# Altium PCB AVR精简学习板.PcbDoc (part 4 of 10)
Units mm, origin at the board's own origin, x right, y up, seen from the top; angles counter-clockwise.
Board outline 152.4 x 101.6 mm, 2 copper layers (Top Layer, Bottom Layer); 44 components, 51 nets, 211 pads, 6 vias.
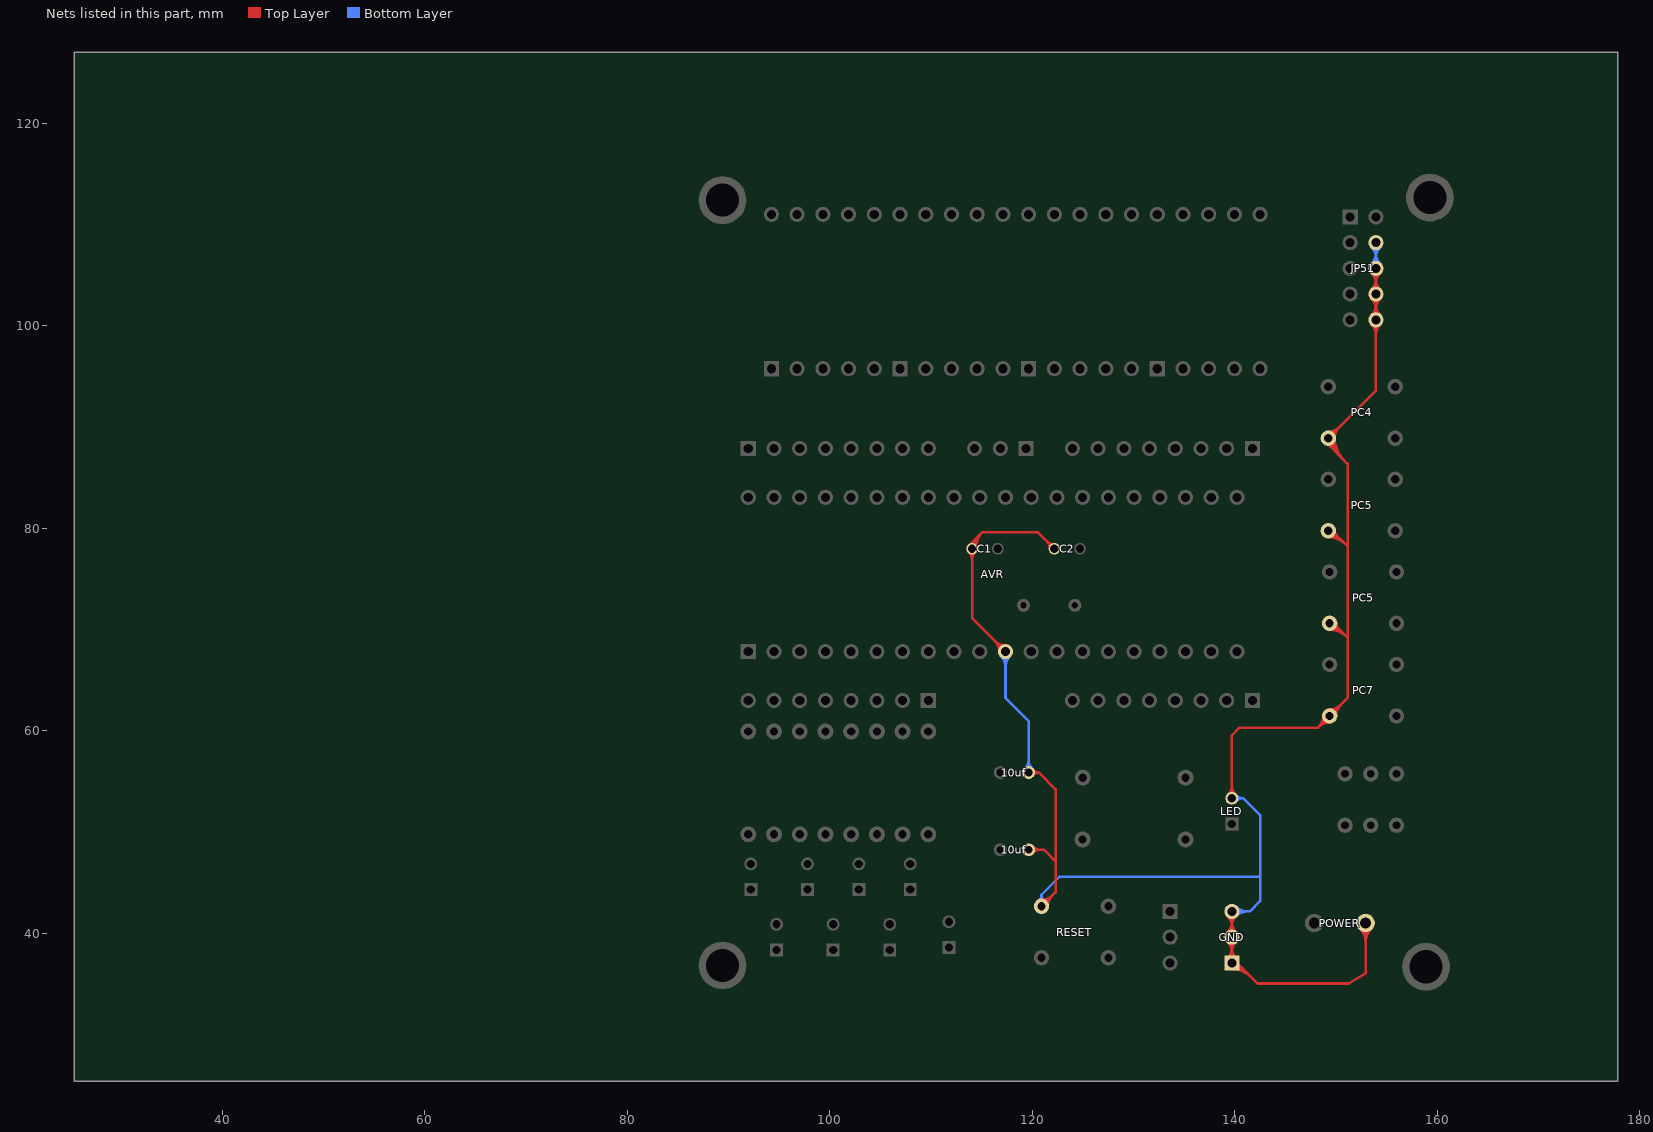
[diagram p4: the nets of this part, all layers, seen from the top]

## Via types
v1: diameter 1.27, hole 0.711, Top Layer to Bottom Layer, 6 vias

## Nets (pads, with @x,y where several pads share a name; then routed paths per layer and width w, separated by ;. In a path a pad name is that pad's centre, name@x,y a point inside that pad or via, vN(x,y) a via of type N, cw(c..) or ccw(c..) an arc to the next point about the centre after c; other vN are vias at no path point) (continued)
GND: 10uf.2 AVR.11 C1.2 C2.1 GND.1 GND.2 GND.3 JP51.4 JP51.6 JP51.8 JP51.10 LED.2 PC4.2 PC5.2 PC7.2 POWER.2 RESET.0 | length 902.6
  Top Layer w0.254: AVR.11@117.348,67.818 114.046,71.12 114.046,78.613 ; 10uf.2@119.634,48.26 121.158,48.26 122.301,47.117 ; 10uf.2@119.634,55.88 120.65,55.88 ; RESET.0@120.904,42.672 122.301,44.069 122.301,54.229 120.65,55.88 ; C2.1@122.174,77.978 120.523,79.629 115.062,79.629 ; GND.3@139.7,42.164 GND.1@139.7,37.084 140.208,37.084 142.24,35.052 151.257,35.052 152.908,36.068 152.908,40.513 POWER.2@152.4,40.64 ; LED.2@139.7,53.34 139.7,59.563 140.462,60.325 148.209,60.325 151.13,63.246 151.13,86.36 149.225,88.265 PC4.2@149.225,88.9 153.924,93.599 JP51.6@153.924,105.664 ; PC5.2@149.225,79.756 149.606,79.756 151.13,78.232 ; PC5.2@149.352,70.612 149.733,70.612 151.13,69.215 ; POWER.2@152.353,40.466 cw(c151.013,39.126) 152.908,39.126 cw(c154.803,39.126) POWER.2@153.463,40.466 ; POWER.2@152.533,40.646 cw(c151.626,39.739) 152.908,39.739 cw(c154.19,39.739) POWER.2@153.283,40.646 ; C1.2@113.732,77.664 cw(c112.973,76.905) 114.046,76.905 ; C1.2@113.732,77.664 cw(c112.973,76.905) 114.046,76.905 ; C1.2@113.732,77.664 cw(c112.973,76.905) 114.046,76.905 ; C1.2@113.732,77.664 cw(c112.973,76.905) 114.046,76.905 ; C1.2@113.732,77.664 cw(c112.973,76.905) 114.046,76.905 ; C1.2@113.732,77.664 cw(c112.973,76.905) 114.046,76.905 ; C1.2@113.732,77.664 cw(c112.973,76.905) 114.046,76.905 ; C1.2@113.894,78.396 ccw(c113.815,78.613) 114.046,78.613 ; C1.2@113.894,78.396 ccw(c113.815,78.613) 114.046,78.613 ; C1.2@113.894,78.396 ccw(c113.815,78.613) 114.046,78.613 ; C1.2@113.894,78.396 ccw(c113.815,78.613) 114.046,78.613 ; C1.2@113.894,78.396 ccw(c113.815,78.613) 114.046,78.613 ; C1.2@113.894,78.396 ccw(c113.815,78.613) 114.046,78.613 ; C1.2@113.894,78.396 ccw(c113.815,78.613) 114.046,78.613 ; C1.2@113.983,77.972 cw(c115.092,78.083) 114.304,78.871 ; C1.2@113.983,77.972 cw(c115.092,78.083) 114.304,78.871 ; C1.2@113.983,77.972 cw(c115.092,78.083) 114.304,78.871 ; C1.2@113.983,77.972 cw(c115.092,78.083) 114.304,78.871 ; C1.2@113.983,77.972 cw(c115.092,78.083) 114.304,78.871 ; C1.2@113.983,77.972 cw(c115.092,78.083) 114.304,78.871 ; C1.2@113.983,77.972 cw(c115.092,78.083) 114.304,78.871 ; 114.046,76.905 cw(c115.119,76.905) C1.2@114.36,77.664 ; 114.046,76.905 cw(c115.119,76.905) C1.2@114.36,77.664 ; 114.046,76.905 cw(c115.119,76.905) C1.2@114.36,77.664 ; 114.046,76.905 cw(c115.119,76.905) C1.2@114.36,77.664 ; 114.046,76.905 cw(c115.119,76.905) C1.2@114.36,77.664 ; 114.046,76.905 cw(c115.119,76.905) C1.2@114.36,77.664 ; 114.046,76.905 cw(c115.119,76.905) C1.2@114.36,77.664 ; 114.046,78.613 ccw(c114.277,78.613) C1.2@114.198,78.396 ; 114.046,78.613 ccw(c114.277,78.613) C1.2@114.198,78.396 ; 114.046,78.613 ccw(c114.277,78.613) C1.2@114.198,78.396 ; 114.046,78.613 ccw(c114.277,78.613) C1.2@114.198,78.396 ; 114.046,78.613 ccw(c114.277,78.613) C1.2@114.198,78.396 ; 114.046,78.613 ccw(c114.277,78.613) C1.2@114.198,78.396 ; 114.046,78.613 ccw(c114.277,78.613) C1.2@114.198,78.396 ; 114.046,78.613 115.062,79.629 ; C1.2@114.236,77.997 cw(c115.781,78.151) 114.683,79.25 ; C1.2@114.236,77.997 cw(c115.781,78.151) 114.683,79.25 ; C1.2@114.236,77.997 cw(c115.781,78.151) 114.683,79.25 ; C1.2@114.236,77.997 cw(c115.781,78.151) 114.683,79.25 ; C1.2@114.236,77.997 cw(c115.781,78.151) 114.683,79.25 ; C1.2@114.236,77.997 cw(c115.781,78.151) 114.683,79.25 ; C1.2@114.236,77.997 cw(c115.781,78.151) 114.683,79.25 ; C1.2@114.488,78.022 cw(c116.471,78.22) 115.062,79.629 ; C1.2@114.488,78.022 cw(c116.471,78.22) 115.062,79.629 ; C1.2@114.488,78.022 cw(c116.471,78.22) 115.062,79.629 ; C1.2@114.488,78.022 cw(c116.471,78.22) 115.062,79.629 ; C1.2@114.488,78.022 cw(c116.471,78.22) 115.062,79.629 ; C1.2@114.488,78.022 cw(c116.471,78.22) 115.062,79.629 ; C1.2@114.488,78.022 cw(c116.471,78.22) 115.062,79.629 ; 116.284,68.882 cw(c115.221,67.818) AVR.11@116.725,67.818 ; 116.284,68.882 ccw(c117.348,69.945) AVR.11@117.348,68.441 ; 116.284,68.882 cw(c115.221,67.818) AVR.11@116.725,67.818 ; 116.284,68.882 ccw(c117.348,69.945) AVR.11@117.348,68.441 ; 116.284,68.882 ccw(c117.348,69.945) AVR.11@117.348,68.441 ; 116.284,68.882 cw(c115.221,67.818) AVR.11@116.725,67.818 ; 116.284,68.882 ccw(c117.348,69.945) AVR.11@117.348,68.441 ; 116.284,68.882 cw(c115.221,67.818) AVR.11@116.725,67.818 ; 116.284,68.882 ccw(c117.348,69.945) AVR.11@117.348,68.441 ; 116.284,68.882 cw(c115.221,67.818) AVR.11@116.725,67.818 ; 116.284,68.882 ccw(c117.348,69.945) AVR.11@117.348,68.441 ; 116.284,68.882 cw(c115.221,67.818) AVR.11@116.725,67.818 ; 116.284,68.882 ccw(c117.348,69.945) AVR.11@117.348,68.441 ; 116.284,68.882 cw(c115.221,67.818) AVR.11@116.725,67.818 ; 116.718,68.448 cw(c116.088,67.818) AVR.11@116.979,67.818 ; 116.718,68.448 ccw(c117.348,69.078) AVR.11@117.348,68.187 ; 116.718,68.448 cw(c116.088,67.818) AVR.11@116.979,67.818 ; 116.718,68.448 ccw(c117.348,69.078) AVR.11@117.348,68.187 ; 116.718,68.448 ccw(c117.348,69.078) AVR.11@117.348,68.187 ; 116.718,68.448 cw(c116.088,67.818) AVR.11@116.979,67.818 ; 116.718,68.448 ccw(c117.348,69.078) AVR.11@117.348,68.187 ; 116.718,68.448 cw(c116.088,67.818) AVR.11@116.979,67.818 ; 116.718,68.448 ccw(c117.348,69.078) AVR.11@117.348,68.187 ; 116.718,68.448 cw(c116.088,67.818) AVR.11@116.979,67.818 ; 116.718,68.448 ccw(c117.348,69.078) AVR.11@117.348,68.187 ; 116.718,68.448 cw(c116.088,67.818) AVR.11@116.979,67.818 ; 116.718,68.448 ccw(c117.348,69.078) AVR.11@117.348,68.187 ; 116.718,68.448 cw(c116.088,67.818) AVR.11@116.979,67.818 ; 10uf.2@119.993,47.901 cw(c120.86,47.034) 120.86,48.26 ; 10uf.2@119.993,47.901 cw(c120.86,47.034) 120.86,48.26 ; 10uf.2@119.993,47.901 cw(c120.86,47.034) 120.86,48.26 ; 10uf.2@119.993,47.901 cw(c120.86,47.034) 120.86,48.26 ; 10uf.2@119.993,47.901 cw(c120.86,47.034) 120.86,48.26 ; 10uf.2@119.993,47.901 cw(c120.86,47.034) 120.86,48.26 ; 10uf.2@119.993,47.901 cw(c120.86,47.034) 120.86,48.26 ; 10uf.2@119.993,48.619 ccw(c120.86,49.486) 120.86,48.26 ; 10uf.2@119.993,48.619 ccw(c120.86,49.486) 120.86,48.26 ; 10uf.2@119.993,48.619 ccw(c120.86,49.486) 120.86,48.26 ; 10uf.2@119.993,48.619 ccw(c120.86,49.486) 120.86,48.26 ; 10uf.2@119.993,48.619 ccw(c120.86,49.486) 120.86,48.26 ; 10uf.2@119.993,48.619 ccw(c120.86,49.486) 120.86,48.26 ; 10uf.2@119.993,48.619 ccw(c120.86,49.486) 120.86,48.26 ; 10uf.2@120.04,55.575 cw(c120.65,55.118) 120.65,55.88 ; 10uf.2@120.04,55.575 cw(c120.65,55.118) 120.65,55.88 ; 10uf.2@120.04,55.575 cw(c120.65,55.118) 120.65,55.88 ; 10uf.2@120.04,55.575 cw(c120.65,55.118) 120.65,55.88 ; 10uf.2@120.04,55.575 cw(c120.65,55.118) 120.65,55.88 ; 10uf.2@120.04,55.575 cw(c120.65,55.118) 120.65,55.88 ; 10uf.2@120.04,55.575 cw(c120.65,55.118) 120.65,55.88 ; 10uf.2@120.04,56.185 ccw(c120.65,56.642) 120.65,55.88 ; 10uf.2@120.04,56.185 ccw(c120.65,56.642) 120.65,55.88 ; 10uf.2@120.04,56.185 ccw(c120.65,56.642) 120.65,55.88 ; 10uf.2@120.04,56.185 ccw(c120.65,56.642) 120.65,55.88 ; 10uf.2@120.04,56.185 ccw(c120.65,56.642) 120.65,55.88 ; 10uf.2@120.04,56.185 ccw(c120.65,56.642) 120.65,55.88 ; 10uf.2@120.04,56.185 ccw(c120.65,56.642) 120.65,55.88 ; RESET.0@120.904,43.053 ccw(c120.904,43.973) 121.554,43.322 ; RESET.0@120.904,43.053 ccw(c120.904,43.973) 121.554,43.322 ; RESET.0@120.904,43.053 ccw(c120.904,43.973) 121.554,43.322 ; RESET.0@120.904,43.053 ccw(c120.904,43.973) 121.554,43.322 ; RESET.0@120.904,43.053 ccw(c120.904,43.973) 121.554,43.322 ; RESET.0@120.904,43.053 ccw(c120.904,43.973) 121.554,43.322 ; RESET.0@120.904,43.053 ccw(c120.904,43.973) 121.554,43.322 ; RESET.0@120.904,43.307 ccw(c120.904,44.84) 121.988,43.756 ; RESET.0@120.904,43.307 ccw(c120.904,44.84) 121.988,43.756 ; RESET.0@120.904,43.307 ccw(c120.904,44.84) 121.988,43.756 ; RESET.0@120.904,43.307 ccw(c120.904,44.84) 121.988,43.756 ; RESET.0@120.904,43.307 ccw(c120.904,44.84) 121.988,43.756 ; RESET.0@120.904,43.307 ccw(c120.904,44.84) 121.988,43.756 ; RESET.0@120.904,43.307 ccw(c120.904,44.84) 121.988,43.756 ; RESET.0@121.285,42.672 cw(c122.205,42.672) 121.554,43.322 ; RESET.0@121.285,42.672 cw(c122.205,42.672) 121.554,43.322 ; RESET.0@121.285,42.672 cw(c122.205,42.672) 121.554,43.322 ; RESET.0@121.285,42.672 cw(c122.205,42.672) 121.554,43.322 ; RESET.0@121.285,42.672 cw(c122.205,42.672) 121.554,43.322 ; RESET.0@121.285,42.672 cw(c122.205,42.672) 121.554,43.322 ; RESET.0@121.285,42.672 cw(c122.205,42.672) 121.554,43.322 ; 121.415,78.737 cw(c120.656,77.978) C2.1@121.73,77.978 ; 121.415,78.737 ccw(c122.174,79.496) C2.1@122.174,78.422 ; 121.415,78.737 cw(c120.656,77.978) C2.1@121.73,77.978 ; 121.415,78.737 ccw(c122.174,79.496) C2.1@122.174,78.422 ; 121.415,78.737 ccw(c122.174,79.496) C2.1@122.174,78.422 ; 121.415,78.737 cw(c120.656,77.978) C2.1@121.73,77.978 ; 121.415,78.737 ccw(c122.174,79.496) C2.1@122.174,78.422 ; 121.415,78.737 cw(c120.656,77.978) C2.1@121.73,77.978 ; 121.415,78.737 ccw(c122.174,79.496) C2.1@122.174,78.422 ; 121.415,78.737 cw(c120.656,77.978) C2.1@121.73,77.978 ; 121.415,78.737 ccw(c122.174,79.496) C2.1@122.174,78.422 ; 121.415,78.737 cw(c120.656,77.978) C2.1@121.73,77.978 ; 121.415,78.737 ccw(c122.174,79.496) C2.1@122.174,78.422 ; 121.415,78.737 cw(c120.656,77.978) C2.1@121.73,77.978 ; RESET.0@121.539,42.672 cw(c123.072,42.672) 121.988,43.756 ; RESET.0@121.539,42.672 cw(c123.072,42.672) 121.988,43.756 ; RESET.0@121.539,42.672 cw(c123.072,42.672) 121.988,43.756 ; RESET.0@121.539,42.672 cw(c123.072,42.672) 121.988,43.756 ; RESET.0@121.539,42.672 cw(c123.072,42.672) 121.988,43.756 ; RESET.0@121.539,42.672 cw(c123.072,42.672) 121.988,43.756 ; RESET.0@121.539,42.672 cw(c123.072,42.672) 121.988,43.756 ; GND.1@139.259,37.525 ccw(c138.196,38.588) 139.7,38.588 ; GND.1@139.259,37.525 ccw(c138.196,38.588) 139.7,38.588 ; GND.1@139.259,37.525 ccw(c138.196,38.588) 139.7,38.588 ; GND.1@139.259,37.525 ccw(c138.196,38.588) 139.7,38.588 ; GND.1@139.259,37.525 ccw(c138.196,38.588) 139.7,38.588 ; GND.1@139.259,37.525 ccw(c138.196,38.588) 139.7,38.588 ; GND.1@139.259,37.525 ccw(c138.196,38.588) 139.7,38.588 ; GND.2@139.259,39.183 cw(c138.196,38.12) 139.7,38.12 ; GND.2@139.259,39.183 cw(c138.196,38.12) 139.7,38.12 ; GND.2@139.259,39.183 cw(c138.196,38.12) 139.7,38.12 ; GND.2@139.259,39.183 cw(c138.196,38.12) 139.7,38.12 ; GND.2@139.259,39.183 cw(c138.196,38.12) 139.7,38.12 ; GND.2@139.259,39.183 cw(c138.196,38.12) 139.7,38.12 ; GND.2@139.259,39.183 cw(c138.196,38.12) 139.7,38.12 ; GND.2@139.259,40.065 ccw(c138.196,41.128) 139.7,41.128 ; GND.2@139.259,40.065 ccw(c138.196,41.128) 139.7,41.128 ; GND.2@139.259,40.065 ccw(c138.196,41.128) 139.7,41.128 ; GND.2@139.259,40.065 ccw(c138.196,41.128) 139.7,41.128 ; GND.2@139.259,40.065 ccw(c138.196,41.128) 139.7,41.128 ; GND.2@139.259,40.065 ccw(c138.196,41.128) 139.7,41.128 ; GND.2@139.259,40.065 ccw(c138.196,41.128) 139.7,41.128 ; GND.3@139.259,41.723 cw(c138.196,40.66) 139.7,40.66 ; GND.3@139.259,41.723 cw(c138.196,40.66) 139.7,40.66 ; GND.3@139.259,41.723 cw(c138.196,40.66) 139.7,40.66 ; GND.3@139.259,41.723 cw(c138.196,40.66) 139.7,40.66 ; GND.3@139.259,41.723 cw(c138.196,40.66) 139.7,40.66 ; GND.3@139.259,41.723 cw(c138.196,40.66) 139.7,40.66 ; GND.3@139.259,41.723 cw(c138.196,40.66) 139.7,40.66 ; LED.2@139.341,53.699 ccw(c138.474,54.566) 139.7,54.566 ; LED.2@139.341,53.699 ccw(c138.474,54.566) 139.7,54.566 ; LED.2@139.341,53.699 ccw(c138.474,54.566) 139.7,54.566 ; LED.2@139.341,53.699 ccw(c138.474,54.566) 139.7,54.566 ; LED.2@139.341,53.699 ccw(c138.474,54.566) 139.7,54.566 ; LED.2@139.341,53.699 ccw(c138.474,54.566) 139.7,54.566 ; LED.2@139.341,53.699 ccw(c138.474,54.566) 139.7,54.566 ; GND.1@139.439,37.345 ccw(c138.809,37.975) 139.7,37.975 ; GND.1@139.439,37.345 ccw(c138.809,37.975) 139.7,37.975 ; GND.1@139.439,37.345 ccw(c138.809,37.975) 139.7,37.975 ; GND.1@139.439,37.345 ccw(c138.809,37.975) 139.7,37.975 ; GND.1@139.439,37.345 ccw(c138.809,37.975) 139.7,37.975 ; GND.1@139.439,37.345 ccw(c138.809,37.975) 139.7,37.975 ; GND.1@139.439,37.345 ccw(c138.809,37.975) 139.7,37.975 ; GND.2@139.439,39.363 cw(c138.809,38.733) 139.7,38.733 ; GND.2@139.439,39.363 cw(c138.809,38.733) 139.7,38.733 ; GND.2@139.439,39.363 cw(c138.809,38.733) 139.7,38.733 ; GND.2@139.439,39.363 cw(c138.809,38.733) 139.7,38.733 ; GND.2@139.439,39.363 cw(c138.809,38.733) 139.7,38.733 ; GND.2@139.439,39.363 cw(c138.809,38.733) 139.7,38.733 ; GND.2@139.439,39.363 cw(c138.809,38.733) 139.7,38.733 ; GND.2@139.439,39.885 ccw(c138.809,40.515) 139.7,40.515 ; GND.2@139.439,39.885 ccw(c138.809,40.515) 139.7,40.515 ; GND.2@139.439,39.885 ccw(c138.809,40.515) 139.7,40.515 ; GND.2@139.439,39.885 ccw(c138.809,40.515) 139.7,40.515 ; GND.2@139.439,39.885 ccw(c138.809,40.515) 139.7,40.515 ; GND.2@139.439,39.885 ccw(c138.809,40.515) 139.7,40.515 ; GND.2@139.439,39.885 ccw(c138.809,40.515) 139.7,40.515 ; GND.3@139.439,41.903 cw(c138.809,41.273) 139.7,41.273 ; GND.3@139.439,41.903 cw(c138.809,41.273) 139.7,41.273 ; GND.3@139.439,41.903 cw(c138.809,41.273) 139.7,41.273 ; GND.3@139.439,41.903 cw(c138.809,41.273) 139.7,41.273 ; GND.3@139.439,41.903 cw(c138.809,41.273) 139.7,41.273 ; GND.3@139.439,41.903 cw(c138.809,41.273) 139.7,41.273 ; GND.3@139.439,41.903 cw(c138.809,41.273) 139.7,41.273 ; GND.1@139.7,36.461 cw(c139.7,33.731) 141.631,35.661 ; GND.1@139.7,36.461 cw(c139.7,33.731) 141.631,35.661 ; GND.1@139.7,36.461 cw(c139.7,33.731) 141.631,35.661 ; GND.1@139.7,36.461 cw(c139.7,33.731) 141.631,35.661 ; GND.1@139.7,36.461 cw(c139.7,33.731) 141.631,35.661 ; GND.1@139.7,36.461 cw(c139.7,33.731) 141.631,35.661 ; GND.1@139.7,36.461 cw(c139.7,33.731) 141.631,35.661 ; GND.1@139.7,36.715 cw(c139.7,34.598) 141.197,36.095 ; GND.1@139.7,36.715 cw(c139.7,34.598) 141.197,36.095 ; GND.1@139.7,36.715 cw(c139.7,34.598) 141.197,36.095 ; GND.1@139.7,36.715 cw(c139.7,34.598) 141.197,36.095 ; GND.1@139.7,36.715 cw(c139.7,34.598) 141.197,36.095 ; GND.1@139.7,36.715 cw(c139.7,34.598) 141.197,36.095 ; GND.1@139.7,36.715 cw(c139.7,34.598) 141.197,36.095 ; GND.1@139.7,36.969 cw(c139.7,35.465) 140.764,36.528 ; GND.1@139.7,36.969 cw(c139.7,35.465) 140.764,36.528 ; GND.1@139.7,36.969 cw(c139.7,35.465) 140.764,36.528 ; GND.1@139.7,36.969 cw(c139.7,35.465) 140.764,36.528 ; GND.1@139.7,36.969 cw(c139.7,35.465) 140.764,36.528 ; GND.1@139.7,36.969 cw(c139.7,35.465) 140.764,36.528 ; GND.1@139.7,36.969 cw(c139.7,35.465) 140.764,36.528 ; 139.7,37.975 ccw(c140.591,37.975) GND.1@139.961,37.345 ; 139.7,37.975 ccw(c140.591,37.975) GND.1@139.961,37.345 ; 139.7,37.975 ccw(c140.591,37.975) GND.1@139.961,37.345 ; 139.7,37.975 ccw(c140.591,37.975) GND.1@139.961,37.345 ; 139.7,37.975 ccw(c140.591,37.975) GND.1@139.961,37.345 ; 139.7,37.975 ccw(c140.591,37.975) GND.1@139.961,37.345 ; 139.7,37.975 ccw(c140.591,37.975) GND.1@139.961,37.345 ; 139.7,38.12 cw(c141.204,38.12) GND.2@140.141,39.183 ; 139.7,38.12 cw(c141.204,38.12) GND.2@140.141,39.183 ; 139.7,38.12 cw(c141.204,38.12) GND.2@140.141,39.183 ; 139.7,38.12 cw(c141.204,38.12) GND.2@140.141,39.183 ; 139.7,38.12 cw(c141.204,38.12) GND.2@140.141,39.183 ; 139.7,38.12 cw(c141.204,38.12) GND.2@140.141,39.183 ; 139.7,38.12 cw(c141.204,38.12) GND.2@140.141,39.183 ; 139.7,38.588 ccw(c141.204,38.588) GND.1@140.141,37.525 ; 139.7,38.588 ccw(c141.204,38.588) GND.1@140.141,37.525 ; 139.7,38.588 ccw(c141.204,38.588) GND.1@140.141,37.525 ; 139.7,38.588 ccw(c141.204,38.588) GND.1@140.141,37.525 ; 139.7,38.588 ccw(c141.204,38.588) GND.1@140.141,37.525 ; 139.7,38.588 ccw(c141.204,38.588) GND.1@140.141,37.525 ; 139.7,38.588 ccw(c141.204,38.588) GND.1@140.141,37.525 ; 139.7,38.733 cw(c140.591,38.733) GND.2@139.961,39.363 ; 139.7,38.733 cw(c140.591,38.733) GND.2@139.961,39.363 ; 139.7,38.733 cw(c140.591,38.733) GND.2@139.961,39.363 ; 139.7,38.733 cw(c140.591,38.733) GND.2@139.961,39.363 ; 139.7,38.733 cw(c140.591,38.733) GND.2@139.961,39.363 ; 139.7,38.733 cw(c140.591,38.733) GND.2@139.961,39.363 ; 139.7,38.733 cw(c140.591,38.733) GND.2@139.961,39.363 ; 139.7,40.515 ccw(c140.591,40.515) GND.2@139.961,39.885 ; 139.7,40.515 ccw(c140.591,40.515) GND.2@139.961,39.885 ; 139.7,40.515 ccw(c140.591,40.515) GND.2@139.961,39.885 ; 139.7,40.515 ccw(c140.591,40.515) GND.2@139.961,39.885 ; 139.7,40.515 ccw(c140.591,40.515) GND.2@139.961,39.885 ; 139.7,40.515 ccw(c140.591,40.515) GND.2@139.961,39.885 ; 139.7,40.515 ccw(c140.591,40.515) GND.2@139.961,39.885 ; 139.7,40.66 cw(c141.204,40.66) GND.3@140.141,41.723 ; 139.7,40.66 cw(c141.204,40.66) GND.3@140.141,41.723 ; 139.7,40.66 cw(c141.204,40.66) GND.3@140.141,41.723 ; 139.7,40.66 cw(c141.204,40.66) GND.3@140.141,41.723 ; 139.7,40.66 cw(c141.204,40.66) GND.3@140.141,41.723 ; 139.7,40.66 cw(c141.204,40.66) GND.3@140.141,41.723 ; 139.7,40.66 cw(c141.204,40.66) GND.3@140.141,41.723 ; 139.7,41.128 ccw(c141.204,41.128) GND.2@140.141,40.065 ; 139.7,41.128 ccw(c141.204,41.128) GND.2@140.141,40.065 ; 139.7,41.128 ccw(c141.204,41.128) GND.2@140.141,40.065 ; 139.7,41.128 ccw(c141.204,41.128) GND.2@140.141,40.065 ; 139.7,41.128 ccw(c141.204,41.128) GND.2@140.141,40.065 ; 139.7,41.128 ccw(c141.204,41.128) GND.2@140.141,40.065 ; 139.7,41.128 ccw(c141.204,41.128) GND.2@140.141,40.065 ; 139.7,41.273 cw(c140.591,41.273) GND.3@139.961,41.903 ; 139.7,41.273 cw(c140.591,41.273) GND.3@139.961,41.903 ; 139.7,41.273 cw(c140.591,41.273) GND.3@139.961,41.903 ; 139.7,41.273 cw(c140.591,41.273) GND.3@139.961,41.903 ; 139.7,41.273 cw(c140.591,41.273) GND.3@139.961,41.903 ; 139.7,41.273 cw(c140.591,41.273) GND.3@139.961,41.903 ; 139.7,41.273 cw(c140.591,41.273) GND.3@139.961,41.903 ; 139.7,54.566 ccw(c140.926,54.566) LED.2@140.059,53.699 ; 139.7,54.566 ccw(c140.926,54.566) LED.2@140.059,53.699 ; 139.7,54.566 ccw(c140.926,54.566) LED.2@140.059,53.699 ; 139.7,54.566 ccw(c140.926,54.566) LED.2@140.059,53.699 ; 139.7,54.566 ccw(c140.926,54.566) LED.2@140.059,53.699 ; 139.7,54.566 ccw(c140.926,54.566) LED.2@140.059,53.699 ; 139.7,54.566 ccw(c140.926,54.566) LED.2@140.059,53.699 ; 148.268,60.384 cw(c149.352,59.3) PC7.2@149.352,60.833 ; 148.268,60.384 ccw(c147.184,61.468) PC7.2@148.717,61.468 ; 148.268,60.384 cw(c149.352,59.3) PC7.2@149.352,60.833 ; 148.268,60.384 ccw(c147.184,61.468) PC7.2@148.717,61.468 ; 148.268,60.384 ccw(c147.184,61.468) PC7.2@148.717,61.468 ; 148.268,60.384 cw(c149.352,59.3) PC7.2@149.352,60.833 ; 148.268,60.384 ccw(c147.184,61.468) PC7.2@148.717,61.468 ; 148.268,60.384 cw(c149.352,59.3) PC7.2@149.352,60.833 ; 148.268,60.384 ccw(c147.184,61.468) PC7.2@148.717,61.468 ; 148.268,60.384 cw(c149.352,59.3) PC7.2@149.352,60.833 ; 148.268,60.384 ccw(c147.184,61.468) PC7.2@148.717,61.468 ; 148.268,60.384 cw(c149.352,59.3) PC7.2@149.352,60.833 ; 148.268,60.384 ccw(c147.184,61.468) PC7.2@148.717,61.468 ; 148.268,60.384 cw(c149.352,59.3) PC7.2@149.352,60.833 ; 148.702,60.818 cw(c149.352,60.167) PC7.2@149.352,61.087 ; 148.702,60.818 ccw(c148.051,61.468) PC7.2@148.971,61.468 ; 148.702,60.818 cw(c149.352,60.167) PC7.2@149.352,61.087 ; 148.702,60.818 ccw(c148.051,61.468) PC7.2@148.971,61.468 ; 148.702,60.818 ccw(c148.051,61.468) PC7.2@148.971,61.468 ; 148.702,60.818 cw(c149.352,60.167) PC7.2@149.352,61.087 ; 148.702,60.818 ccw(c148.051,61.468) PC7.2@148.971,61.468 ; 148.702,60.818 cw(c149.352,60.167) PC7.2@149.352,61.087 ; 148.702,60.818 ccw(c148.051,61.468) PC7.2@148.971,61.468 ; 148.702,60.818 cw(c149.352,60.167) PC7.2@149.352,61.087 ; 148.702,60.818 ccw(c148.051,61.468) PC7.2@148.971,61.468 ; 148.702,60.818 cw(c149.352,60.167) PC7.2@149.352,61.087 ; 148.702,60.818 ccw(c148.051,61.468) PC7.2@148.971,61.468 ; 148.702,60.818 cw(c149.352,60.167) PC7.2@149.352,61.087 ; PC4.2@149.098,88.9 ccw(c150.324,88.9) 149.457,88.033 ; PC4.2@149.098,88.9 ccw(c150.324,88.9) 149.457,88.033 ; PC4.2@149.098,88.9 ccw(c150.324,88.9) 149.457,88.033 ; PC4.2@149.098,88.9 ccw(c150.324,88.9) 149.457,88.033 ; PC4.2@149.098,88.9 ccw(c150.324,88.9) 149.457,88.033 ; PC4.2@149.098,88.9 ccw(c150.324,88.9) 149.457,88.033 ; PC4.2@149.098,88.9 ccw(c150.324,88.9) 149.457,88.033 ; PC5.2@149.225,79.121 cw(c149.225,76.668) 150.959,78.403 ; PC5.2@149.225,79.121 cw(c149.225,76.668) 150.959,78.403 ; PC5.2@149.225,79.121 cw(c149.225,76.668) 150.959,78.403 ; PC5.2@149.225,79.121 cw(c149.225,76.668) 150.959,78.403 ; PC5.2@149.225,79.121 cw(c149.225,76.668) 150.959,78.403 ; PC5.2@149.225,79.121 cw(c149.225,76.668) 150.959,78.403 ; PC5.2@149.225,79.121 cw(c149.225,76.668) 150.959,78.403 ; PC5.2@149.225,79.375 cw(c149.225,77.535) 150.526,78.836 ; PC5.2@149.225,79.375 cw(c149.225,77.535) 150.526,78.836 ; PC5.2@149.225,79.375 cw(c149.225,77.535) 150.526,78.836 ; PC5.2@149.225,79.375 cw(c149.225,77.535) 150.526,78.836 ; PC5.2@149.225,79.375 cw(c149.225,77.535) 150.526,78.836 ; PC5.2@149.225,79.375 cw(c149.225,77.535) 150.526,78.836 ; PC5.2@149.225,79.375 cw(c149.225,77.535) 150.526,78.836 ; PC5.2@149.225,79.629 cw(c149.225,78.403) 150.092,79.27 ; PC5.2@149.225,79.629 cw(c149.225,78.403) 150.092,79.27 ; PC5.2@149.225,79.629 cw(c149.225,78.403) 150.092,79.27 ; PC5.2@149.225,79.629 cw(c149.225,78.403) 150.092,79.27 ; PC5.2@149.225,79.629 cw(c149.225,78.403) 150.092,79.27 ; PC5.2@149.225,79.629 cw(c149.225,78.403) 150.092,79.27 ; PC5.2@149.225,79.629 cw(c149.225,78.403) 150.092,79.27 ; PC4.2@149.225,89.281 ccw(c149.225,90.201) 149.875,89.55 ; PC4.2@149.225,89.281 ccw(c149.225,90.201) 149.875,89.55 ; PC4.2@149.225,89.281 ccw(c149.225,90.201) 149.875,89.55 ; PC4.2@149.225,89.281 ccw(c149.225,90.201) 149.875,89.55 ; PC4.2@149.225,89.281 ccw(c149.225,90.201) 149.875,89.55 ; PC4.2@149.225,89.281 ccw(c149.225,90.201) 149.875,89.55 ; PC4.2@149.225,89.281 ccw(c149.225,90.201) 149.875,89.55 ; PC4.2@149.225,89.535 ccw(c149.225,91.068) 150.309,89.984 ; PC4.2@149.225,89.535 ccw(c149.225,91.068) 150.309,89.984 ; PC4.2@149.225,89.535 ccw(c149.225,91.068) 150.309,89.984 ; PC4.2@149.225,89.535 ccw(c149.225,91.068) 150.309,89.984 ; PC4.2@149.225,89.535 ccw(c149.225,91.068) 150.309,89.984 ; PC4.2@149.225,89.535 ccw(c149.225,91.068) 150.309,89.984 ; PC4.2@149.225,89.535 ccw(c149.225,91.068) 150.309,89.984 ; PC7.2@149.352,61.849 ccw(c149.352,62.769) 150.002,62.118 ; PC7.2@149.352,61.849 ccw(c149.352,62.769) 150.002,62.118 ; PC7.2@149.352,61.849 ccw(c149.352,62.769) 150.002,62.118 ; PC7.2@149.352,61.849 ccw(c149.352,62.769) 150.002,62.118 ; PC7.2@149.352,61.849 ccw(c149.352,62.769) 150.002,62.118 ; PC7.2@149.352,61.849 ccw(c149.352,62.769) 150.002,62.118 ; PC7.2@149.352,61.849 ccw(c149.352,62.769) 150.002,62.118 ; PC7.2@149.352,62.103 ccw(c149.352,63.636) 150.436,62.552 ; PC7.2@149.352,62.103 ccw(c149.352,63.636) 150.436,62.552 ; PC7.2@149.352,62.103 ccw(c149.352,63.636) 150.436,62.552 ; PC7.2@149.352,62.103 ccw(c149.352,63.636) 150.436,62.552 ; PC7.2@149.352,62.103 ccw(c149.352,63.636) 150.436,62.552 ; PC7.2@149.352,62.103 ccw(c149.352,63.636) 150.436,62.552 ; PC7.2@149.352,62.103 ccw(c149.352,63.636) 150.436,62.552 ; PC5.2@149.352,69.977 cw(c149.352,67.524) 151.086,69.259 ; PC5.2@149.352,69.977 cw(c149.352,67.524) 151.086,69.259 ; PC5.2@149.352,69.977 cw(c149.352,67.524) 151.086,69.259 ; PC5.2@149.352,69.977 cw(c149.352,67.524) 151.086,69.259 ; PC5.2@149.352,69.977 cw(c149.352,67.524) 151.086,69.259 ; PC5.2@149.352,69.977 cw(c149.352,67.524) 151.086,69.259 ; PC5.2@149.352,69.977 cw(c149.352,67.524) 151.086,69.259 ; PC5.2@149.352,70.231 cw(c149.352,68.391) 150.653,69.692 ; PC5.2@149.352,70.231 cw(c149.352,68.391) 150.653,69.692 ; PC5.2@149.352,70.231 cw(c149.352,68.391) 150.653,69.692 ; PC5.2@149.352,70.231 cw(c149.352,68.391) 150.653,69.692 ; PC5.2@149.352,70.231 cw(c149.352,68.391) 150.653,69.692 ; PC5.2@149.352,70.231 cw(c149.352,68.391) 150.653,69.692 ; PC5.2@149.352,70.231 cw(c149.352,68.391) 150.653,69.692 ; PC5.2@149.352,70.485 cw(c149.352,69.259) 150.219,70.126 ; PC5.2@149.352,70.485 cw(c149.352,69.259) 150.219,70.126 ; PC5.2@149.352,70.485 cw(c149.352,69.259) 150.219,70.126 ; PC5.2@149.352,70.485 cw(c149.352,69.259) 150.219,70.126 ; PC5.2@149.352,70.485 cw(c149.352,69.259) 150.219,70.126 ; PC5.2@149.352,70.485 cw(c149.352,69.259) 150.219,70.126 ; PC5.2@149.352,70.485 cw(c149.352,69.259) 150.219,70.126 ; PC4.2@149.352,88.9 ccw(c151.192,88.9) 149.891,87.599 ; PC4.2@149.352,88.9 ccw(c151.192,88.9) 149.891,87.599 ; PC4.2@149.352,88.9 ccw(c151.192,88.9) 149.891,87.599 ; PC4.2@149.352,88.9 ccw(c151.192,88.9) 149.891,87.599 ; PC4.2@149.352,88.9 ccw(c151.192,88.9) 149.891,87.599 ; PC4.2@149.352,88.9 ccw(c151.192,88.9) 149.891,87.599 ; PC4.2@149.352,88.9 ccw(c151.192,88.9) 149.891,87.599 ; PC4.2@149.606,88.9 cw(c150.526,88.9) 149.875,89.55 ; PC4.2@149.606,88.9 ccw(c152.059,88.9) 150.324,87.166 ; PC4.2@149.606,88.9 cw(c150.526,88.9) 149.875,89.55 ; PC4.2@149.606,88.9 ccw(c152.059,88.9) 150.324,87.166 ; PC4.2@149.606,88.9 ccw(c152.059,88.9) 150.324,87.166 ; PC4.2@149.606,88.9 cw(c150.526,88.9) 149.875,89.55 ; PC4.2@149.606,88.9 ccw(c152.059,88.9) 150.324,87.166 ; PC4.2@149.606,88.9 cw(c150.526,88.9) 149.875,89.55 ; PC4.2@149.606,88.9 ccw(c152.059,88.9) 150.324,87.166 ; PC4.2@149.606,88.9 cw(c150.526,88.9) 149.875,89.55 ; PC4.2@149.606,88.9 ccw(c152.059,88.9) 150.324,87.166 ; PC4.2@149.606,88.9 cw(c150.526,88.9) 149.875,89.55 ; PC4.2@149.606,88.9 ccw(c152.059,88.9) 150.324,87.166 ; PC4.2@149.606,88.9 cw(c150.526,88.9) 149.875,89.55 ; PC7.2@149.733,61.468 cw(c150.653,61.468) 150.002,62.118 ; PC7.2@149.733,61.468 cw(c150.653,61.468) 150.002,62.118 ; PC7.2@149.733,61.468 cw(c150.653,61.468) 150.002,62.118 ; PC7.2@149.733,61.468 cw(c150.653,61.468) 150.002,62.118 ; PC7.2@149.733,61.468 cw(c150.653,61.468) 150.002,62.118 ; PC7.2@149.733,61.468 cw(c150.653,61.468) 150.002,62.118 ; PC7.2@149.733,61.468 cw(c150.653,61.468) 150.002,62.118 ; PC5.2@149.86,79.756 ccw(c150.473,79.756) 150.04,79.322 ; PC5.2@149.86,79.756 ccw(c150.473,79.756) 150.04,79.322 ; PC5.2@149.86,79.756 ccw(c150.473,79.756) 150.04,79.322 ; PC5.2@149.86,79.756 ccw(c150.473,79.756) 150.04,79.322 ; PC5.2@149.86,79.756 ccw(c150.473,79.756) 150.04,79.322 ; PC5.2@149.86,79.756 ccw(c150.473,79.756) 150.04,79.322 ; PC5.2@149.86,79.756 ccw(c150.473,79.756) 150.04,79.322 ; PC4.2@149.86,88.9 cw(c151.393,88.9) 150.309,89.984 ; PC4.2@149.86,88.9 ccw(c152.926,88.9) 150.758,86.732 ; PC4.2@149.86,88.9 cw(c151.393,88.9) 150.309,89.984 ; PC4.2@149.86,88.9 ccw(c152.926,88.9) 150.758,86.732 ; PC4.2@149.86,88.9 ccw(c152.926,88.9) 150.758,86.732 ; PC4.2@149.86,88.9 cw(c151.393,88.9) 150.309,89.984 ; PC4.2@149.86,88.9 ccw(c152.926,88.9) 150.758,86.732 ; PC4.2@149.86,88.9 cw(c151.393,88.9) 150.309,89.984 ; PC4.2@149.86,88.9 ccw(c152.926,88.9) 150.758,86.732 ; PC4.2@149.86,88.9 cw(c151.393,88.9) 150.309,89.984 ; PC4.2@149.86,88.9 ccw(c152.926,88.9) 150.758,86.732 ; PC4.2@149.86,88.9 cw(c151.393,88.9) 150.309,89.984 ; PC4.2@149.86,88.9 ccw(c152.926,88.9) 150.758,86.732 ; PC4.2@149.86,88.9 cw(c151.393,88.9) 150.309,89.984 ; PC7.2@149.987,61.468 cw(c151.52,61.468) 150.436,62.552 ; PC7.2@149.987,61.468 cw(c151.52,61.468) 150.436,62.552 ; PC7.2@149.987,61.468 cw(c151.52,61.468) 150.436,62.552 ; PC7.2@149.987,61.468 cw(c151.52,61.468) 150.436,62.552 ; PC7.2@149.987,61.468 cw(c151.52,61.468) 150.436,62.552 ; PC7.2@149.987,61.468 cw(c151.52,61.468) 150.436,62.552 ; PC7.2@149.987,61.468 cw(c151.52,61.468) 150.436,62.552 ; PC5.2@149.987,70.612 ccw(c150.6,70.612) 150.167,70.178 ; PC5.2@149.987,70.612 ccw(c150.6,70.612) 150.167,70.178 ; PC5.2@149.987,70.612 ccw(c150.6,70.612) 150.167,70.178 ; PC5.2@149.987,70.612 ccw(c150.6,70.612) 150.167,70.178 ; PC5.2@149.987,70.612 ccw(c150.6,70.612) 150.167,70.178 ; PC5.2@149.987,70.612 ccw(c150.6,70.612) 150.167,70.178 ; PC5.2@149.987,70.612 ccw(c150.6,70.612) 150.167,70.178 ; JP51.10@153.483,100.143 cw(c152.42,99.08) 153.924,99.08 ; JP51.10@153.483,100.143 cw(c152.42,99.08) 153.924,99.08 ; JP51.10@153.483,100.143 cw(c152.42,99.08) 153.924,99.08 ; JP51.10@153.483,100.143 cw(c152.42,99.08) 153.924,99.08 ; JP51.10@153.483,100.143 cw(c152.42,99.08) 153.924,99.08 ; JP51.10@153.483,100.143 cw(c152.42,99.08) 153.924,99.08 ; JP51.10@153.483,100.143 cw(c152.42,99.08) 153.924,99.08 ; JP51.10@153.483,101.025 ccw(c152.42,102.088) 153.924,102.088 ; JP51.10@153.483,101.025 ccw(c152.42,102.088) 153.924,102.088 ; JP51.10@153.483,101.025 ccw(c152.42,102.088) 153.924,102.088 ; JP51.10@153.483,101.025 ccw(c152.42,102.088) 153.924,102.088 ; JP51.10@153.483,101.025 ccw(c152.42,102.088) 153.924,102.088 ; JP51.10@153.483,101.025 ccw(c152.42,102.088) 153.924,102.088 ; JP51.10@153.483,101.025 ccw(c152.42,102.088) 153.924,102.088 ; JP51.8@153.483,102.683 cw(c152.42,101.62) 153.924,101.62 ; JP51.8@153.483,102.683 cw(c152.42,101.62) 153.924,101.62 ; JP51.8@153.483,102.683 cw(c152.42,101.62) 153.924,101.62 ; JP51.8@153.483,102.683 cw(c152.42,101.62) 153.924,101.62 ; JP51.8@153.483,102.683 cw(c152.42,101.62) 153.924,101.62 ; JP51.8@153.483,102.683 cw(c152.42,101.62) 153.924,101.62 ; JP51.8@153.483,102.683 cw(c152.42,101.62) 153.924,101.62 ; JP51.8@153.483,103.565 ccw(c152.42,104.628) 153.924,104.628 ; JP51.8@153.483,103.565 ccw(c152.42,104.628) 153.924,104.628 ; JP51.8@153.483,103.565 ccw(c152.42,104.628) 153.924,104.628 ; JP51.8@153.483,103.565 ccw(c152.42,104.628) 153.924,104.628 ; JP51.8@153.483,103.565 ccw(c152.42,104.628) 153.924,104.628 ; JP51.8@153.483,103.565 ccw(c152.42,104.628) 153.924,104.628 ; JP51.8@153.483,103.565 ccw(c152.42,104.628) 153.924,104.628 ; JP51.6@153.483,105.223 cw(c152.42,104.16) 153.924,104.16 ; JP51.6@153.483,105.223 cw(c152.42,104.16) 153.924,104.16 ; JP51.6@153.483,105.223 cw(c152.42,104.16) 153.924,104.16 ; JP51.6@153.483,105.223 cw(c152.42,104.16) 153.924,104.16 ; JP51.6@153.483,105.223 cw(c152.42,104.16) 153.924,104.16 ; JP51.6@153.483,105.223 cw(c152.42,104.16) 153.924,104.16 ; JP51.6@153.483,105.223 cw(c152.42,104.16) 153.924,104.16 ; JP51.10@153.663,100.323 cw(c153.033,99.693) 153.924,99.693 ; JP51.10@153.663,100.323 cw(c153.033,99.693) 153.924,99.693 ; JP51.10@153.663,100.323 cw(c153.033,99.693) 153.924,99.693 ; JP51.10@153.663,100.323 cw(c153.033,99.693) 153.924,99.693 ; JP51.10@153.663,100.323 cw(c153.033,99.693) 153.924,99.693 ; JP51.10@153.663,100.323 cw(c153.033,99.693) 153.924,99.693 ; JP51.10@153.663,100.323 cw(c153.033,99.693) 153.924,99.693 ; JP51.10@153.663,100.845 ccw(c153.033,101.475) 153.924,101.475 ; JP51.10@153.663,100.845 ccw(c153.033,101.475) 153.924,101.475 ; JP51.10@153.663,100.845 ccw(c153.033,101.475) 153.924,101.475 ; JP51.10@153.663,100.845 ccw(c153.033,101.475) 153.924,101.475 ; JP51.10@153.663,100.845 ccw(c153.033,101.475) 153.924,101.475 ; JP51.10@153.663,100.845 ccw(c153.033,101.475) 153.924,101.475 ; JP51.10@153.663,100.845 ccw(c153.033,101.475) 153.924,101.475 ; JP51.8@153.663,102.863 cw(c153.033,102.233) 153.924,102.233 ; JP51.8@153.663,102.863 cw(c153.033,102.233) 153.924,102.233 ; JP51.8@153.663,102.863 cw(c153.033,102.233) 153.924,102.233 ; JP51.8@153.663,102.863 cw(c153.033,102.233) 153.924,102.233 ; JP51.8@153.663,102.863 cw(c153.033,102.233) 153.924,102.233 ; JP51.8@153.663,102.863 cw(c153.033,102.233) 153.924,102.233 ; JP51.8@153.663,102.863 cw(c153.033,102.233) 153.924,102.233 ; JP51.8@153.663,103.385 ccw(c153.033,104.015) 153.924,104.015 ; JP51.8@153.663,103.385 ccw(c153.033,104.015) 153.924,104.015 ; JP51.8@153.663,103.385 ccw(c153.033,104.015) 153.924,104.015 ; JP51.8@153.663,103.385 ccw(c153.033,104.015) 153.924,104.015 ; JP51.8@153.663,103.385 ccw(c153.033,104.015) 153.924,104.015 ; JP51.8@153.663,103.385 ccw(c153.033,104.015) 153.924,104.015 ; JP51.8@153.663,103.385 ccw(c153.033,104.015) 153.924,104.015 ; JP51.6@153.663,105.403 cw(c153.033,104.773) 153.924,104.773 ; JP51.6@153.663,105.403 cw(c153.033,104.773) 153.924,104.773 ; JP51.6@153.663,105.403 cw(c153.033,104.773) 153.924,104.773 ; JP51.6@153.663,105.403 cw(c153.033,104.773) 153.924,104.773 ; JP51.6@153.663,105.403 cw(c153.033,104.773) 153.924,104.773 ; JP51.6@153.663,105.403 cw(c153.033,104.773) 153.924,104.773 ; JP51.6@153.663,105.403 cw(c153.033,104.773) 153.924,104.773 ; 153.924,99.08 cw(c155.428,99.08) JP51.10@154.365,100.143 ; 153.924,99.08 cw(c155.428,99.08) JP51.10@154.365,100.143 ; 153.924,99.08 cw(c155.428,99.08) JP51.10@154.365,100.143 ; 153.924,99.08 cw(c155.428,99.08) JP51.10@154.365,100.143 ; 153.924,99.08 cw(c155.428,99.08) JP51.10@154.365,100.143 ; 153.924,99.08 cw(c155.428,99.08) JP51.10@154.365,100.143 ; 153.924,99.08 cw(c155.428,99.08) JP51.10@154.365,100.143 ; 153.924,99.693 cw(c154.815,99.693) JP51.10@154.185,100.323 ; 153.924,99.693 cw(c154.815,99.693) JP51.10@154.185,100.323 ; 153.924,99.693 cw(c154.815,99.693) JP51.10@154.185,100.323 ; 153.924,99.693 cw(c154.815,99.693) JP51.10@154.185,100.323 ; 153.924,99.693 cw(c154.815,99.693) JP51.10@154.185,100.323 ; 153.924,99.693 cw(c154.815,99.693) JP51.10@154.185,100.323 ; 153.924,99.693 cw(c154.815,99.693) JP51.10@154.185,100.323 ; 153.924,101.475 ccw(c154.815,101.475) JP51.10@154.185,100.845 ; 153.924,101.475 ccw(c154.815,101.475) JP51.10@154.185,100.845 ; 153.924,101.475 ccw(c154.815,101.475) JP51.10@154.185,100.845 ; 153.924,101.475 ccw(c154.815,101.475) JP51.10@154.185,100.845 ; 153.924,101.475 ccw(c154.815,101.475) JP51.10@154.185,100.845 ; 153.924,101.475 ccw(c154.815,101.475) JP51.10@154.185,100.845 ; 153.924,101.475 ccw(c154.815,101.475) JP51.10@154.185,100.845 ; 153.924,101.62 cw(c155.428,101.62) JP51.8@154.365,102.683 ; 153.924,101.62 cw(c155.428,101.62) JP51.8@154.365,102.683 ; 153.924,101.62 cw(c155.428,101.62) JP51.8@154.365,102.683 ; 153.924,101.62 cw(c155.428,101.62) JP51.8@154.365,102.683 ; 153.924,101.62 cw(c155.428,101.62) JP51.8@154.365,102.683 ; 153.924,101.62 cw(c155.428,101.62) JP51.8@154.365,102.683 ; 153.924,101.62 cw(c155.428,101.62) JP51.8@154.365,102.683 ; 153.924,102.088 ccw(c155.428,102.088) JP51.10@154.365,101.025 ; 153.924,102.088 ccw(c155.428,102.088) JP51.10@154.365,101.025 ; 153.924,102.088 ccw(c155.428,102.088) JP51.10@154.365,101.025 ; 153.924,102.088 ccw(c155.428,102.088) JP51.10@154.365,101.025 ; 153.924,102.088 ccw(c155.428,102.088) JP51.10@154.365,101.025 ; 153.924,102.088 ccw(c155.428,102.088) JP51.10@154.365,101.025 ; 153.924,102.088 ccw(c155.428,102.088) JP51.10@154.365,101.025 ; 153.924,102.233 cw(c154.815,102.233) JP51.8@154.185,102.863 ; 153.924,102.233 cw(c154.815,102.233) JP51.8@154.185,102.863 ; 153.924,102.233 cw(c154.815,102.233) JP51.8@154.185,102.863 ; 153.924,102.233 cw(c154.815,102.233) JP51.8@154.185,102.863 ; 153.924,102.233 cw(c154.815,102.233) JP51.8@154.185,102.863 ; 153.924,102.233 cw(c154.815,102.233) JP51.8@154.185,102.863 ; 153.924,102.233 cw(c154.815,102.233) JP51.8@154.185,102.863 ; 153.924,104.015 ccw(c154.815,104.015) JP51.8@154.185,103.385 ; 153.924,104.015 ccw(c154.815,104.015) JP51.8@154.185,103.385 ; 153.924,104.015 ccw(c154.815,104.015) JP51.8@154.185,103.385 ; 153.924,104.015 ccw(c154.815,104.015) JP51.8@154.185,103.385 ; 153.924,104.015 ccw(c154.815,104.015) JP51.8@154.185,103.385 ; 153.924,104.015 ccw(c154.815,104.015) JP51.8@154.185,103.385 ; 153.924,104.015 ccw(c154.815,104.015) JP51.8@154.185,103.385 ; 153.924,104.16 cw(c155.428,104.16) JP51.6@154.365,105.223 ; 153.924,104.16 cw(c155.428,104.16) JP51.6@154.365,105.223 ; 153.924,104.16 cw(c155.428,104.16) JP51.6@154.365,105.223 ; 153.924,104.16 cw(c155.428,104.16) JP51.6@154.365,105.223 ; 153.924,104.16 cw(c155.428,104.16) JP51.6@154.365,105.223 ; 153.924,104.16 cw(c155.428,104.16) JP51.6@154.365,105.223 ; 153.924,104.16 cw(c155.428,104.16) JP51.6@154.365,105.223 ; 153.924,104.628 ccw(c155.428,104.628) JP51.8@154.365,103.565 ; 153.924,104.628 ccw(c155.428,104.628) JP51.8@154.365,103.565 ; 153.924,104.628 ccw(c155.428,104.628) JP51.8@154.365,103.565 ; 153.924,104.628 ccw(c155.428,104.628) JP51.8@154.365,103.565 ; 153.924,104.628 ccw(c155.428,104.628) JP51.8@154.365,103.565 ; 153.924,104.628 ccw(c155.428,104.628) JP51.8@154.365,103.565 ; 153.924,104.628 ccw(c155.428,104.628) JP51.8@154.365,103.565 ; 153.924,104.773 cw(c154.815,104.773) JP51.6@154.185,105.403 ; 153.924,104.773 cw(c154.815,104.773) JP51.6@154.185,105.403 ; 153.924,104.773 cw(c154.815,104.773) JP51.6@154.185,105.403 ; 153.924,104.773 cw(c154.815,104.773) JP51.6@154.185,105.403 ; 153.924,104.773 cw(c154.815,104.773) JP51.6@154.185,105.403 ; 153.924,104.773 cw(c154.815,104.773) JP51.6@154.185,105.403 ; 153.924,104.773 cw(c154.815,104.773) JP51.6@154.185,105.403
  Bottom Layer w0.254: AVR.11@117.348,67.818 117.348,63.246 119.634,60.96 10uf.2@119.634,55.88 ; RESET.0@120.904,42.672 120.904,43.815 ; GND.3@139.7,42.164 141.478,42.164 142.494,43.18 142.494,51.689 140.843,53.34 ; LED.2@139.7,53.34 140.843,53.34 ; 142.494,45.593 122.682,45.593 120.904,43.815 ; JP51.6@153.483,106.105 ccw(c152.42,107.168) 153.924,107.168 ccw(c155.428,107.168) JP51.6@154.365,106.105 ; JP51.4@153.483,107.763 cw(c152.42,106.7) 153.924,106.7 cw(c155.428,106.7) JP51.4@154.365,107.763 ; JP51.6@153.663,105.925 ccw(c153.033,106.555) 153.924,106.555 ccw(c154.815,106.555) JP51.6@154.185,105.925 ; JP51.4@153.663,107.943 cw(c153.033,107.313) 153.924,107.313 cw(c154.815,107.313) JP51.4@154.185,107.943 ; JP51.6@153.924,105.664 JP51.4@153.924,108.204 ; AVR.11@116.907,67.377 cw(c115.844,66.314) 117.348,66.314 ; AVR.11@116.907,67.377 cw(c115.844,66.314) 117.348,66.314 ; AVR.11@116.907,67.377 cw(c115.844,66.314) 117.348,66.314 ; AVR.11@116.907,67.377 cw(c115.844,66.314) 117.348,66.314 ; AVR.11@116.907,67.377 cw(c115.844,66.314) 117.348,66.314 ; AVR.11@116.907,67.377 cw(c115.844,66.314) 117.348,66.314 ; AVR.11@116.907,67.377 cw(c115.844,66.314) 117.348,66.314 ; AVR.11@117.087,67.557 cw(c116.457,66.927) 117.348,66.927 ; AVR.11@117.087,67.557 cw(c116.457,66.927) 117.348,66.927 ; AVR.11@117.087,67.557 cw(c116.457,66.927) 117.348,66.927 ; AVR.11@117.087,67.557 cw(c116.457,66.927) 117.348,66.927 ; AVR.11@117.087,67.557 cw(c116.457,66.927) 117.348,66.927 ; AVR.11@117.087,67.557 cw(c116.457,66.927) 117.348,66.927 ; AVR.11@117.087,67.557 cw(c116.457,66.927) 117.348,66.927 ; 117.348,66.314 cw(c118.852,66.314) AVR.11@117.789,67.377 ; 117.348,66.314 cw(c118.852,66.314) AVR.11@117.789,67.377 ; 117.348,66.314 cw(c118.852,66.314) AVR.11@117.789,67.377 ; 117.348,66.314 cw(c118.852,66.314) AVR.11@117.789,67.377 ; 117.348,66.314 cw(c118.852,66.314) AVR.11@117.789,67.377 ; 117.348,66.314 cw(c118.852,66.314) AVR.11@117.789,67.377 ; 117.348,66.314 cw(c118.852,66.314) AVR.11@117.789,67.377 ; 117.348,66.927 cw(c118.239,66.927) AVR.11@117.609,67.557 ; 117.348,66.927 cw(c118.239,66.927) AVR.11@117.609,67.557 ; 117.348,66.927 cw(c118.239,66.927) AVR.11@117.609,67.557 ; 117.348,66.927 cw(c118.239,66.927) AVR.11@117.609,67.557 ; 117.348,66.927 cw(c118.239,66.927) AVR.11@117.609,67.557 ; 117.348,66.927 cw(c118.239,66.927) AVR.11@117.609,67.557 ; 117.348,66.927 cw(c118.239,66.927) AVR.11@117.609,67.557 ; 10uf.2@119.275,56.239 ccw(c118.408,57.106) 119.634,57.106 ; 10uf.2@119.275,56.239 ccw(c118.408,57.106) 119.634,57.106 ; 10uf.2@119.275,56.239 ccw(c118.408,57.106) 119.634,57.106 ; 10uf.2@119.275,56.239 ccw(c118.408,57.106) 119.634,57.106 ; 10uf.2@119.275,56.239 ccw(c118.408,57.106) 119.634,57.106 ; 10uf.2@119.275,56.239 ccw(c118.408,57.106) 119.634,57.106 ; 10uf.2@119.275,56.239 ccw(c118.408,57.106) 119.634,57.106 ; 119.634,57.106 ccw(c120.86,57.106) 10uf.2@119.993,56.239 ; 119.634,57.106 ccw(c120.86,57.106) 10uf.2@119.993,56.239 ; 119.634,57.106 ccw(c120.86,57.106) 10uf.2@119.993,56.239 ; 119.634,57.106 ccw(c120.86,57.106) 10uf.2@119.993,56.239 ; 119.634,57.106 ccw(c120.86,57.106) 10uf.2@119.993,56.239 ; 119.634,57.106 ccw(c120.86,57.106) 10uf.2@119.993,56.239 ; 119.634,57.106 ccw(c120.86,57.106) 10uf.2@119.993,56.239 ; RESET.0@120.569,43.211 ccw(c120.193,43.815) 120.904,43.815 ; RESET.0@120.569,43.211 ccw(c120.193,43.815) 120.904,43.815 ; RESET.0@120.569,43.211 ccw(c120.193,43.815) 120.904,43.815 ; RESET.0@120.569,43.211 ccw(c120.193,43.815) 120.904,43.815 ; RESET.0@120.569,43.211 ccw(c120.193,43.815) 120.904,43.815 ; RESET.0@120.569,43.211 ccw(c120.193,43.815) 120.904,43.815 ; RESET.0@120.569,43.211 ccw(c120.193,43.815) 120.904,43.815 ; 120.904,43.815 ccw(c121.615,43.815) RESET.0@121.239,43.211 ; 120.904,43.815 ccw(c121.615,43.815) RESET.0@121.239,43.211 ; 120.904,43.815 ccw(c121.615,43.815) RESET.0@121.239,43.211 ; 120.904,43.815 ccw(c121.615,43.815) RESET.0@121.239,43.211 ; 120.904,43.815 ccw(c121.615,43.815) RESET.0@121.239,43.211 ; 120.904,43.815 ccw(c121.615,43.815) RESET.0@121.239,43.211 ; 120.904,43.815 ccw(c121.615,43.815) RESET.0@121.239,43.211 ; GND.3@139.961,41.903 cw(c140.591,41.273) 140.591,42.164 ; GND.3@139.961,41.903 cw(c140.591,41.273) 140.591,42.164 ; GND.3@139.961,41.903 cw(c140.591,41.273) 140.591,42.164 ; GND.3@139.961,41.903 cw(c140.591,41.273) 140.591,42.164 ; GND.3@139.961,41.903 cw(c140.591,41.273) 140.591,42.164 ; GND.3@139.961,41.903 cw(c140.591,41.273) 140.591,42.164 ; GND.3@139.961,41.903 cw(c140.591,41.273) 140.591,42.164 ; GND.3@139.961,42.425 ccw(c140.591,43.055) 140.591,42.164 ; GND.3@139.961,42.425 ccw(c140.591,43.055) 140.591,42.164 ; GND.3@139.961,42.425 ccw(c140.591,43.055) 140.591,42.164 ; GND.3@139.961,42.425 ccw(c140.591,43.055) 140.591,42.164 ; GND.3@139.961,42.425 ccw(c140.591,43.055) 140.591,42.164 ; GND.3@139.961,42.425 ccw(c140.591,43.055) 140.591,42.164 ; GND.3@139.961,42.425 ccw(c140.591,43.055) 140.591,42.164 ; LED.2@140.077,53 cw(c140.843,52.308) 140.843,53.34 ; LED.2@140.077,53 cw(c140.843,52.308) 140.843,53.34 ; LED.2@140.077,53 cw(c140.843,52.308) 140.843,53.34 ; LED.2@140.077,53 cw(c140.843,52.308) 140.843,53.34 ; LED.2@140.077,53 cw(c140.843,52.308) 140.843,53.34 ; LED.2@140.077,53 cw(c140.843,52.308) 140.843,53.34 ; LED.2@140.077,53 cw(c140.843,52.308) 140.843,53.34 ; LED.2@140.077,53.68 ccw(c140.843,54.372) 140.843,53.34 ; LED.2@140.077,53.68 ccw(c140.843,54.372) 140.843,53.34 ; LED.2@140.077,53.68 ccw(c140.843,54.372) 140.843,53.34 ; LED.2@140.077,53.68 ccw(c140.843,54.372) 140.843,53.34 ; LED.2@140.077,53.68 ccw(c140.843,54.372) 140.843,53.34 ; LED.2@140.077,53.68 ccw(c140.843,54.372) 140.843,53.34 ; LED.2@140.077,53.68 ccw(c140.843,54.372) 140.843,53.34 ; GND.3@140.141,41.723 cw(c141.204,40.66) 141.204,42.164 ; GND.3@140.141,41.723 cw(c141.204,40.66) 141.204,42.164 ; GND.3@140.141,41.723 cw(c141.204,40.66) 141.204,42.164 ; GND.3@140.141,41.723 cw(c141.204,40.66) 141.204,42.164 ; GND.3@140.141,41.723 cw(c141.204,40.66) 141.204,42.164 ; GND.3@140.141,41.723 cw(c141.204,40.66) 141.204,42.164 ; GND.3@140.141,41.723 cw(c141.204,40.66) 141.204,42.164 ; GND.3@140.141,42.605 ccw(c141.204,43.668) 141.204,42.164 ; GND.3@140.141,42.605 ccw(c141.204,43.668) 141.204,42.164 ; GND.3@140.141,42.605 ccw(c141.204,43.668) 141.204,42.164 ; GND.3@140.141,42.605 ccw(c141.204,43.668) 141.204,42.164 ; GND.3@140.141,42.605 ccw(c141.204,43.668) 141.204,42.164 ; GND.3@140.141,42.605 ccw(c141.204,43.668) 141.204,42.164 ; GND.3@140.141,42.605 ccw(c141.204,43.668) 141.204,42.164